# Altium PCB SIP00755AG.PCBDOC
Units mm, origin at the board's own origin, x right, y up, seen from the top; angles counter-clockwise.
Board outline 465 x 283.5 mm, 2 copper layers (Top Layer, Bottom Layer); 37 components, 59 nets, 178 pads, 25 vias.
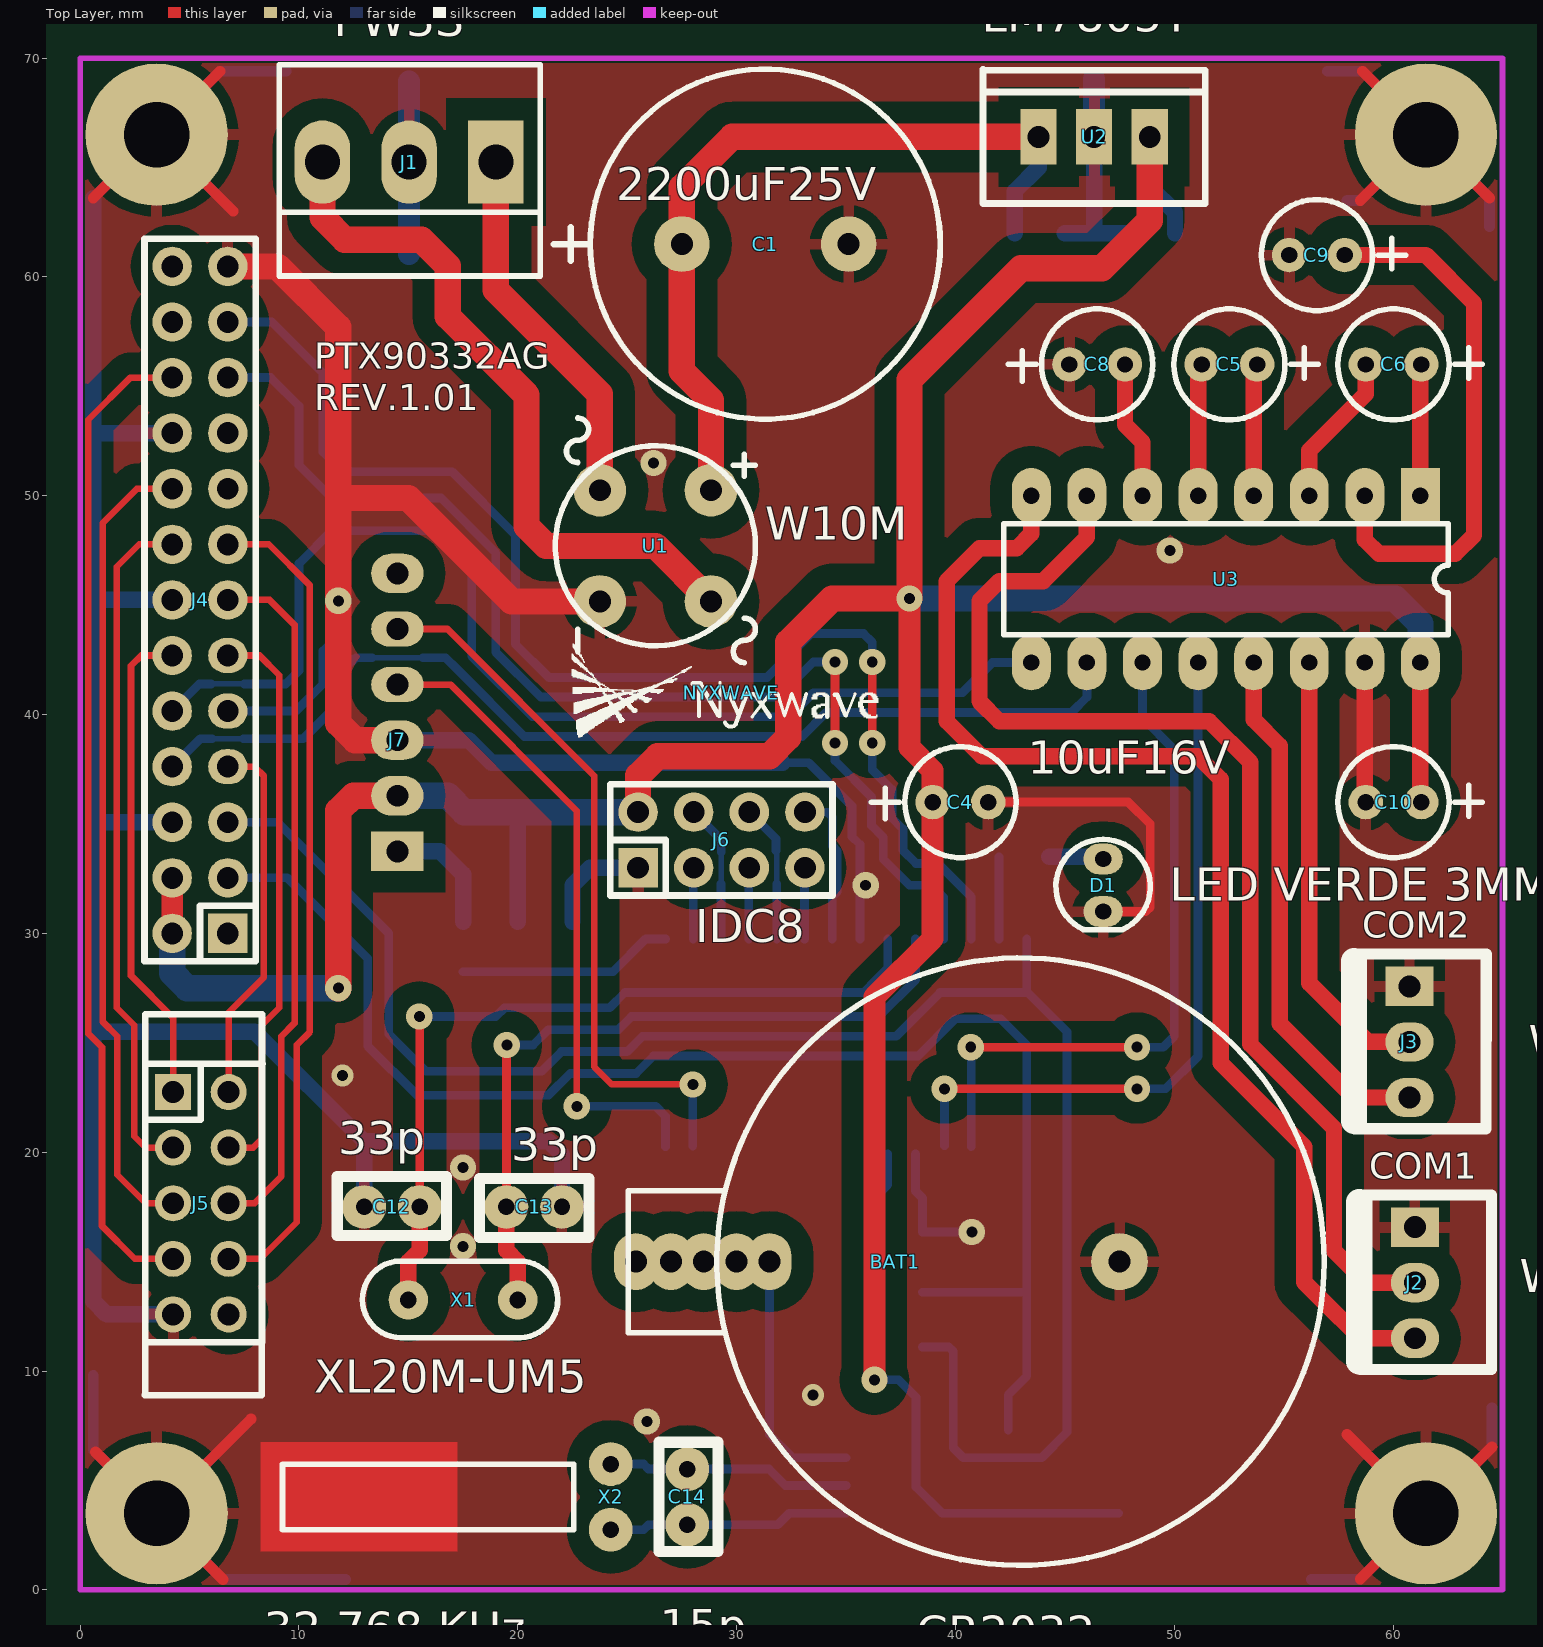
[diagram p0: Top Layer view]
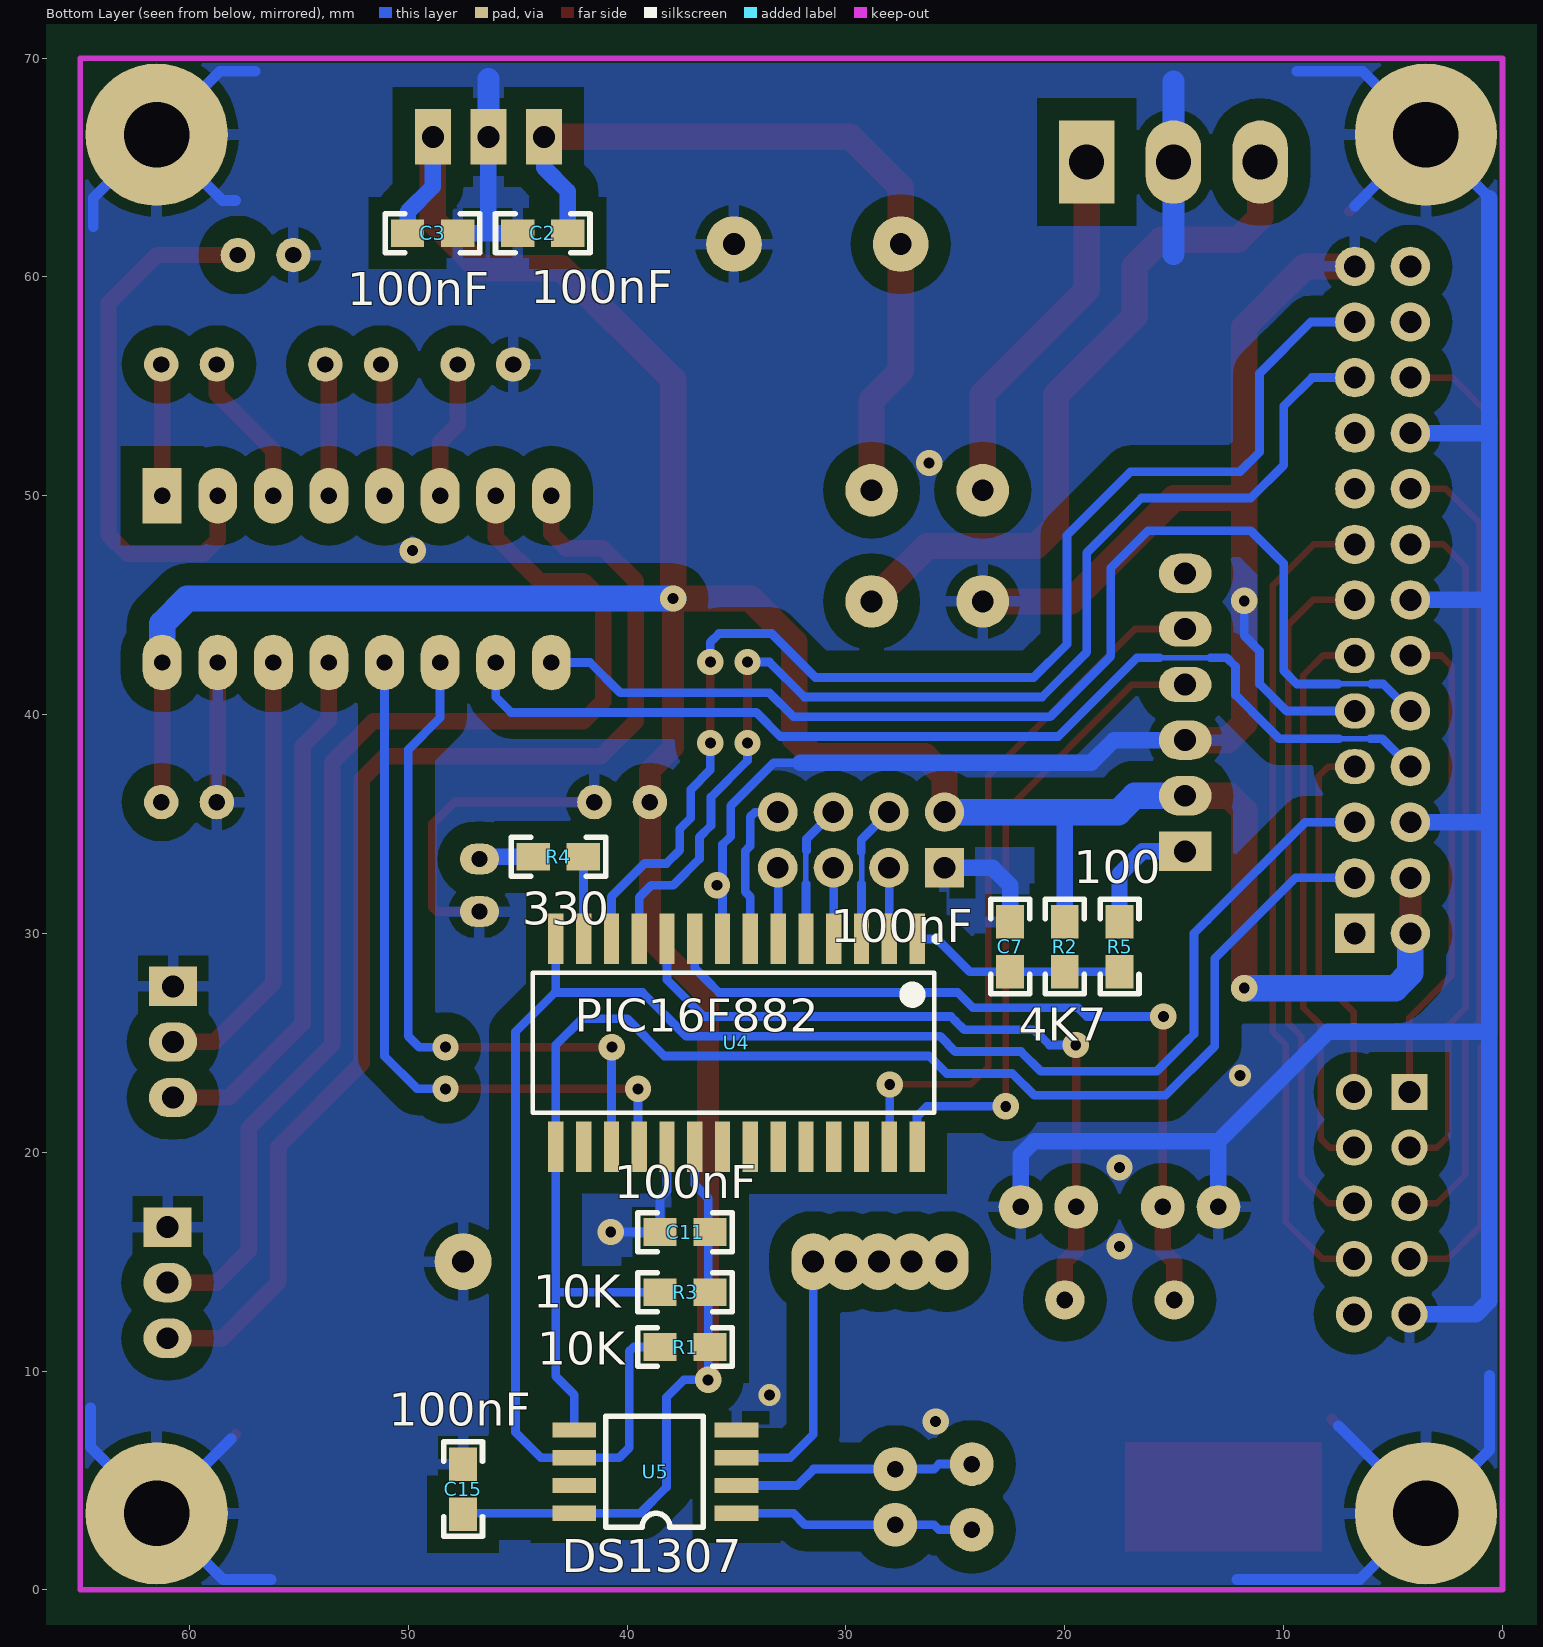
[diagram p1: Bottom Layer view, seen from below]

## Layer stack, top to bottom
Top Layer: signal copper 0.0356
Dielectric: dielectric 0.32, FR-4, Dk 4.8
Bottom Layer: signal copper 0.0356

## Board outline
-137.2,-168.2 -137.2,115 327.8,115 327.8,-168.5 -137.1,-168.5

## Design rules (kind name [scope] priority, off if disabled: settings)
Clearance GND [InNet('GND') vs InNet('GND')] p1: gap=0.5
Clearance KEEP [All vs OnLayer('Keep-Out Layer')] p2: gap=0.1
Clearance [All] p3: gap=1
ComponentClearance [All] p1: gap=0.254 collisioncheckmode=3 verticalgap=0.254
PolygonConnect [All] p1: connectstyle=Relief reliefconductorwidth=0.5 reliefentries=4 polygonreliefangle="90 Angle"
RoutingVias [All] p1: holewidth=0.711 width=1.27 viastyle="Through Hole" minholewidth=0.711 minwidth=1.27 maxholewidth=0.711 maxwidth=1.27
SolderMaskExpansion [All] p1: expansion=0.102
TestPointUsage [All] p1: valid=0 allowmultiple=FALSE
Testpoint [All] p1: side=15 testpointundercomponent=TRUE minsize=1.016 maxsize=2.54 preferedsize=1.524 minholesize=0 maxholesize=1.016 preferedholesize=0.813 testpointgrid=0.025 style=1023 order=0-112345678
Width [All] p1: maxlimit=3 minlimit=0.2 preferedwidth=0.3 bottomlayer_prefwidth=0.75 minimp=50.000000 maximp=50.000000 favimp=50.000000
17 further rules are at their usual default settings.

## Components (designator, comment, footprint, x,y, rotation, side; value= is the part's Value field where it differs from the comment)
BAT1 "CR2032" "CR2032 HOLDER" 27,15 r0 top locked
C1 "2200uF25V" "CE 7.5/16.0" 27.5,61.5 r0 top locked
C2 "100nF" 0805 45,62 r180 bottom locked
C3 "100nF" 0805 47.75,62 r0 bottom locked
C4 "10uF16V" "CE 2.5/5.0" 41.5,36 r180 top locked
C5 "10uF50V" "CE 2.5/5.0" 51.25,56 r0 top locked
C6 "10uF50V" "CE 2.5/5.0" 58.75,56 r0 top locked
C7 "100nF" 0805 22.5,28.25 r90 bottom locked
C8 "10uF50V" "CE 2.5/5.0" 47.75,56 r180 top locked
C9 "10uF50V" "CE 2.5/5.0" 55.25,61 r0 top locked
C10 "10uF50V" "CE 2.5/5.0" 58.75,36 r0 top locked
C11 "100nF" 0805 38.5,16.35 r180 bottom locked
C12 "33p" CAP2.54 14.25,17.5 r0 top locked
C13 "33p" CAP2.54 20.75,17.5 r180 top locked
C14 "15p" CAP2.54 27.75,4.25 r270 top locked
C15 "100nF" 0805 47.5,5.75 r270 bottom locked
D1 "LED VERDE 3MM" "LED 3MM" 46.75,31 r270 top locked
J1 "PW3S" PW3S 19,65.25 r180 top locked
J2 "WF3S" WF3S 61,11.5 r90 top locked
J3 "WF3S" WF3S 60.75,22.5 r90 top locked
J4 "HEADER26" IDC26 6.75,30 r90 top locked
J5 "IDC10" IDC10 4.25,22.75 r270 top locked
J6 "IDC8" IDC8 25.5,33 r0 top locked
J7 "ICSP" ICSP 14.5,33.75 r90 top locked
NYXWAVE "LOGO NYX" LOGO_NYX 29.75,41 r0 top locked
R1 "10K" 0805 38.5,11.1 r180 bottom locked
R2 "4K7" 0805 20,28.25 r90 bottom locked
R3 "10K" 0805 38.5,13.6 r180 bottom locked
R4 "330" 0805 42,33.5 r0 bottom locked
R5 "100" 0805 17.5,28.25 r90 bottom locked
U1 "W10M" CASE22 23.75,50.25 r90 top locked
U2 "LM7805T" TO-220_2 43.8,66.4 r0 top locked
U3 "MAX232 DIP-16" DIP16 61.25,50 r270 top locked
U4 "PIC16F882" "SOIC 28" 26.75,29.75 r270 bottom locked
U5 "DS1307" "soic 8" 35,3.5 r0 bottom locked
X1 "XL20M-UM5" UM5 15,13.25 r0 top locked
X2 "32.768 KHz" "XTAL ACOSTADO" 24.25,5.75 r270 top locked

## Footprints (in the part's own frame and the unit in brackets; to place one, negate y for a bottom-side part, rotate by r counter-clockwise, add the part's x,y. Pads: shape width x height; smd on the part's side, far side on the other; paste and mask are expansions set on the pad)
0805 [mil]
  rect 60x50 smd: 1(0,0) 2(90,0)
  silkscreen extent -40,-35 130,35
CAP2.54 [mm] "CAPACITOR AXIAL 2.54"
  round 2 hole 0.75: 1(-1.27,0) 2(1.27,0)
  silkscreen extent -2.5,-1.3 2.5,1.4
CASE22 [mm]
  round 2.4 hole 1: 1(0,-5.08) 2(0,0) 3(-5.08,0) 4(-5.08,-5.08)
  silkscreen extent -7.87,-7.11 3.3,2.03
"CE 2.5/5.0" [mil]
  round 62 hole 29.53: 1(100,0) 2(0,0)
  silkscreen extent -50,-100 210,100
"CE 7.5/16.0" [mm]
  round 2.54 hole 1: 1(0,0) 2(7.62,0)
  silkscreen extent -5.84,-8 11.81,8
"CR2032 HOLDER" [mm]
  oval 2x2.6 hole 1: +(0,0)
  round 2.6 hole 1: -(20.5,0)
  silkscreen extent -1.96,-13.88 29.86,13.88
DIP16 [mm]
  rect 2.54x1.778 hole 0.75: 1(0,0)
  oval 2.54x1.778 hole 0.75: 2(0,-2.54) 3(0,-5.08) 4(0,-7.62) 5(0,-10.16) 6(0,-12.7) 7(0,-15.24) 8(0,-17.78) 9(7.62,-17.78) 10(7.62,-15.24) 11(7.62,-12.7) 12(7.62,-10.16) 13(7.62,-7.62) 14(7.62,-5.08) 15(7.62,-2.54) 16(7.62,0)
  silkscreen extent 1.27,-19.05 6.35,1.27
ICSP [mm] "PROGRAMADOR PICKIT 2"
  round 1.3 on Top Overlay: 0(-2.515,0)
  rect 1.8x2.4 hole 1: 1(0,0)
  oval 1.8x2.4 hole 1: 2(2.54,0) 3(5.08,0) 6(12.7,0)
  oval 1.6x2.4 hole 1: 4(7.62,0) 5(10.16,0)
IDC8 [mm]
  rect 1.8x1.8 hole 1: 1(0,0)
  round 1.8 hole 1: 2(0,2.54) 3(2.54,0) 4(2.54,2.54) 5(5.08,0) 6(5.08,2.54) 7(7.62,0) 8(7.62,2.54)
  silkscreen extent -1.27,-1.27 8.88,3.81
IDC10 [mil]
  rect 65x65 hole 39.37: 1(0,0)
  round 65 hole 39.37: 2(0,100) 3(100,0) 4(100,100) 5(200,0) 6(200,100) 7(300,0) 8(300,100) 9(400,0) 10(400,100)
  silkscreen extent -140,-51 545,161
IDC26 [mm]
  rect 1.8x1.8 hole 1: 1(0,0)
  round 1.8 hole 1: 2(0,2.54) 3(2.54,0) 4(2.54,2.54) 5(5.08,0) 6(5.08,2.54) 8(7.62,2.54) 10(10.16,2.54) 12(12.7,2.54) 13(15.24,0) 14(15.24,2.54) 15(17.78,0) 16(17.78,2.54) 17(20.32,0) 18(20.32,2.54) 19(22.86,0) 20(22.86,2.54) 21(25.4,0) 22(25.4,2.54) 23(27.94,0) 24(27.94,2.54) 25(30.48,0) 26(30.48,2.54)
  oval 1.6x1.8 hole 1: 7(7.62,0) 9(10.16,0) 11(12.7,0)
  silkscreen extent -1.27,-1.27 31.75,3.81
"LED 3MM" [mm]
  oval 1.4x1.8 hole 0.75: A(-2.4,0) K(0,0)
  silkscreen extent -3.3,-2.16 0.82,2.16
LOGO_NYX [mm] "LOGO DE NYXWAVE"
  silkscreen extent -7.29,-2.01 6.73,2.24
PW3S [mm]
  rect 2.54x3.81 hole 1.6: 1(0,0)
  oval 2.54x3.81 hole 1.6: 2(3.962,0) 3(7.925,0)
  silkscreen extent -2.03,-4.44 9.91,5.21
"soic 8" [mm]
  rect 2x0.7 smd: 1(0,0) 2(0,-1.27) 3(0,-2.54) 4(0,-3.81) 5(7.417,-3.81) 6(7.417,-2.54) 7(7.417,-1.27) 8(7.417,0)
  silkscreen extent 1.52,-4.44 5.97,0.64
"SOIC 28" [mm]
  rect 2.3x0.7 smd: 1(0,0) 2(0,-1.27) 3(0,-2.54) 4(0,-3.81) 5(0,-5.08) 6(0,-6.35) 7(0,-7.62) 8(0,-8.89) 9(0,-10.16) 10(0,-11.43) 11(0,-12.7) 12(0,-13.97) 13(0,-15.24) 14(0,-16.51) 15(9.5,-16.51) 16(9.5,-15.24) 17(9.5,-13.97) 18(9.5,-12.7) 19(9.5,-11.43) 20(9.5,-10.16) 21(9.5,-8.89) 22(9.5,-7.62) 23(9.5,-6.35) 24(9.5,-5.08) 25(9.5,-3.81) 26(9.5,-2.54) 27(9.5,-1.27) 28(9.5,0)
  silkscreen extent -0.12,-17.56 7.95,1.02
TO-220_2 [mm]
  rect 1.651x2.54 hole 1: 1(0,0) 2(2.54,0) 3(5.08,0)
  silkscreen extent -2.54,-3.05 7.62,3.09
UM5 [mm] "UM-5"
  round 1.8 hole 0.762: 1(0,0) 2(5,0)
  silkscreen extent -2.1,-1.72 6.83,1.78
WF3S [mm]
  rect 1.8x2.2 hole 1: 1(5.08,0)
  oval 1.8x2.2 hole 1: 2(2.54,0) 3(0,0)
  silkscreen extent -1.42,-3.51 6.55,2.54
"XTAL ACOSTADO" [mm]
  round 2 hole 0.75: 1(0,0) 2(3,0)
  Top Layer region: -1,-16 4,-16 4,-7 -1,-7
  silkscreen extent 0,-15 3,-1.7

## Part data
BAT1: library part "CR2032 BATTERY 3V", "CR2032 BATTERY 3V"
C1: "CAPACITOR ELECTROLITICO RADIAL 16X25 mm PASO 7.5 mm +/-20% 85ºC 25V 2200uF"
C2 C3 C7 C11 C15: library part 100n, "CAPACITOR SMD 0805 X7R  50 V 100 nF"
C4: "CAPACITOR ELECTROLITICO RADIAL 5X11mm PASO 2mm 85ªC +/-20 16V 10uF"
C5 C6 C8 C9 C10: "CAPACITOR ELECTROLITICO RADIAL 5 X11mm PASO 2 mm 85ºC +/-20% 50 V 10 uF"
C12 C13: "CAPACITOR PLATE NP0 100V PASO 2.54 mm 33 pF"
C14: "CAPACITOR CERAMICO DISCO 2.54 mm  X7R  50V  15pF"
J1: "PW3S HEADER .156\" RECTO 3 VIAS"
J2 J3: "WF3S HEADER .100\" RECTO 3 VIAS"
J4: "CONECTOR IDC MACHO PCB NO POLARIZADO PASO 2.54 mm RECTO 2X13 VIAS"
J5: "CONECTOR IDC HEMBRA PCB NO POLARIZADO PASO 2.54 mm RECTO 2X5 VIAS"
J6: "CONECTOR IDC HEMBRA PCB NO POLARIZADO PASO 2.54 mm RECTO 2X4 VIAS"
J7: "TIRA MOLEX 1X6 11MM MACHO RECTA PARA PCB"
NYXWAVE: library part "LOGO NYXWAVE", "LOGO DE NYXWAVE"
R1 R3: "RESISTOR SMD0805 0.125 W 5%  10 K OHMS"
R2: "RESISTOR SMD0805 0.125 W 5%  4.7 K OHMS"
R4: "RESISTOR METAL FILM 0.5 W 5% 330 OHMS"
R5: "RESISTOR SMD0805 0.125 W 5%  100 OHMS"
U1: "W10M CASE22 CIRC INT RECTIFICADOR PUENTE 1000V 1A"
U2: "LM7805T TO-220 CIRC INT"
U3: "MAX232 DIP-16 CIRCUITO INTEGRADO"
U4: library part "PIC16F882 SOIC28", "PIC16F872 -I/SO SOIC 28 PINES"
U5: "64 X 8 SERIAL REAL TIME CLOCK"
X1: "XL20M-UM5 CRISTAL DE 20 MHZ 10ppm"
X2: "32.768 KHz CRISTAL"

## Free pads (board coordinates)
  round 6.5 hole 3: 0(3.5,3.5) 0(3.5,66.5) 0(61.5,3.5) 0(61.5,66.5)
  oval 2x2.6 hole 1: 0(25.4,15) 0(28.5,15) 0(30,15) 0(31.5,15)
  round 1.4 on Top Overlay: 1(1.6,22.8) 1(9.5,30) 1(25.5,30.6)

## Via types
v1: diameter 1.2, hole 0.5, Top Layer to Bottom Layer, 23 vias
v2: diameter 1, hole 0.5, Top Layer to Bottom Layer, 2 vias

## Nets (pads, with @x,y where several pads share a name; then routed paths per layer and width w, separated by ;. In a path a pad name is that pad's centre, name@x,y a point inside that pad or via, vN(x,y) a via of type N, cw(c..) or ccw(c..) an arc to the next point about the centre after c; other vN are vias at no path point)
+3.3V: J4.17
+3V3: J4.1
+5V: C3.2 C4.1 C10.1 C11.2 C15.2 J4.2 J4.4 J6.2 J7.2 R1.2 R2.2 R3.2 U2.3 U3.16 U4.20 U5.8 | length 188.4
  Top Layer w0.75: C10.1@61.25,36.04 U3.16
  Top Layer w1: J4.2 J4.4 ; v1(36.3,9.6) 36.3,27.1 38.96,29.76 38.96,37.44 37.9,38.5 v1(37.9,45.3)
  Top Layer w1.2: v1(11.8,27.5) 11.8,35.6 12.49,36.29 J7.2 ; J6.2 25.5,37.2 26.4,38.1 31.5,38.1 32.366,38.966 32.366,43.3 34.366,45.3 v1(37.9,45.3) 37.9,55.3 43,60.4 46.7,60.4 48.88,62.58 U2.3
  Bottom Layer w0.4: v1@36.3,9.7 36.405,9.7 36.35,9.648 v1(36.3,9.6) ; U4.20@36.91,19.933 36.91,18.51 36.3,17.9 v1(36.3,9.6) ; C15.2@47.464,3.5 39.4,3.5 38.2,4.7 38.2,8.8 37.4,9.6 v1(36.3,9.6)
  Bottom Layer w0.75: R2.2 20,35.54 ; U2.3 48.88,64.12 50.036,62.964 C3.2
  Bottom Layer w1.2: J4.2 4.21,28.19 4.9,27.5 v1(11.8,27.5) ; J7.2 16.81,36.29 17.56,35.54 J6.2 ; v1(37.9,45.3) 60.1,45.3 61.25,44.15 U3.16
CONTROL: J4.13 J5.6 | length 31.9
  Top Layer w0.3: J4.13 8.66,45.24 9.8,44.1 9.8,25.9 9.2,25.3 9.2,18.9 7.97,17.67 J5.6
"DIR 1": J4.7 J5.2 | length 16.9
  Top Layer w0.3: J4.7 7.98,37.62 8.4,37.2 8.4,28 6.79,26.39 J5.2
"DIR 2": J4.16 J5.3 | length 31.3
  Top Layer w0.3: J4.16 2.7,47.78 1.677,46.757 1.677,26.6 2.477,25.8 2.477,20.733 3,20.21 J5.3
"DIR 3": J4.11 J5.4 | length 25.9
  Top Layer w0.3: J4.11 8.2,42.7 9.1,41.8 9.1,26.6 8.3,25.8 8.3,20.61 7.9,20.21 J5.4
"DIR 4": J4.18 J5.5 | length 37
  Top Layer w0.3: J4.18 2.6,50.32 1.027,48.747 1.027,25.973 1.7,25.3 1.7,18.97 3,17.67 J5.5
ENTRADA: J4.15 J5.8 | length 37.7
  Top Layer w0.3: J4.15 8.62,47.78 10.5,45.9 10.5,25.5 9.9,24.9 9.9,16.8 8.23,15.13 J5.8
GND: BAT1.- C1.2 C2.1 C3.1 C4.2 C7.2 C8.1 C9.2 C10.2 C11.1 C12.1 C13.1 C15.1 D1.K J1.2 J2.1 J3.1 J4.6 J4.9 J4.14 J4.20 J4.25 J5.9 J6.1 J7.3 pad.0@3.5,3.5 pad.0@3.5,66.5 pad.0@61.5,3.5 pad.0@61.5,66.5 U1.3 U2.2 U3.15 U4.8 U4.19 U5.4 | length 347
  Top Layer w0.4: C4.2 47.9,36 48.9,35 48.9,31.2 48.7,31 D1.K
  Top Layer w0.5: 0.6,63.6 6.398,69.398 ; 0.7,6.3 6.523,0.477 ; pad.0@3.5,3.5 7.8,7.8 ; pad.0@3.5,66.5 7,63 ; 57.9,7.1 pad.0@61.5,3.5 ; 58.5,0.5 64.523,6.523 ; 58.5,63.5 pad.0@61.5,66.5 ; 58.6,69.4 64.4,63.6
  Top Layer w0.75: C10.2@58.71,36.11 U3.15
  Top Layer w1.2: J4.25 9.02,60.48 11.8,57.7 11.8,39.6 12.57,38.83 J7.3 ; 11.8,49.9 15,49.9 19.73,45.17 U1.3
  Bottom Layer w0.4: J4.9 9.86,40.16 11.1,41.4 11.1,42.9 11.8,43.6 v1(11.8,45.2) ; 32.1,37.8 33.3,37.8 35.27,35.83 35.27,34.43 35.64,34.06 U4.8 ; U4.19@38.18,19.933 38.18,18.22 38.5,17.9 C11.1 v1(40.75,16.35)
  Bottom Layer w0.5: 0.6,9.8 0.6,6.4 6.523,0.477 12.123,0.477 ; 0.602,63.602 pad.0@3.5,66.5 ; pad.0@3.5,3.5 7.5,7.5 ; 6.75,63.25 pad.0@3.5,66.5 ; 9.4,69.4 6.4,69.4 pad.0@3.5,66.5 ; 56.277,0.477 58.477,0.477 64.523,6.523 64.523,8.323 ; 57,69.4 58.6,69.4 64.4,63.6 64.4,62.3 ; 57.9,63.5 58.5,63.5 pad.0@61.5,66.5 ; 58.1,6.9 pad.0@61.5,3.5
  Bottom Layer w0.75: 0.602,25.5 7.98,25.5 12.98,20.5 ; 0.602,35.08 J4.6 ; 0.602,63.602 0.602,13.198 1.21,12.59 J5.9 ; 0.642,52.86 J4.20 ; 0.662,45.24 J4.14 ; C12.1 12.98,20.5 ; J7.3 17.77,38.83 18.8,37.8 32.1,37.8 ; C13.1 22.02,19.88 21.4,20.5 12.98,20.5 ; C7.2 22.5,32.2 23.3,33 J6.1 ; C2.1 C3.1 ; 46.34,62 U2.2
  Bottom Layer w1: 15.038,61.038 J1.2 15.038,68.938 ; U2.2 46.34,69.04
  other v1: 25.9,7.7 17.5,15.7 17.5,19.3 35.9,32.2 49.8,47.5 26.2,51.5
  other v2: 33.5,8.9 12,23.5
I2C_SCL: J4.5 R1.1 U4.14 U5.6 | length 80.5
  Bottom Layer w0.4: J4.5 9.02,35.08 13.483,30.617 14.1,30 14.1,25.4 14.467,25.033 15.8,23.7 21.1,23.7 22,24.6 25,24.6 25.7,25.3 37.3,25.3 39.3,27.3 43.3,27.3 45.1,25.5 45.1,7.2 43.94,6.04 40.36,6.04 39.9,6.5 39.9,10.9 39.7,11.1 R1.1 ; 43.26,27.34 U4.14
I2C_SDA: J4.3 R3.1 U4.15 U5.5 | length 67.6
  Bottom Layer w0.4: J4.3 9.46,32.54 13.15,28.85 13.15,24.85 15.4,22.6 21.4,22.6 22.4,23.6 25.4,23.6 26.2,24.4 38.3,24.4 40,26.1 42.06,26.1 43.26,24.9 43.26,9.76 42.417,8.917 U5.5 ; R3.1 43.26,13.6
LED: R4.1 U4.13 | length 3.7
  Bottom Layer w0.4: U4.13 R4.1@41.99,33.49
MCLR: C7.1 R2.1 R5.1 U4.1 | length 9.9
  Bottom Layer w0.4: R5.1 24.35,28.25 25.85,29.75 U4.1
NetBAT1_+: BAT1.+ pad.0@25.4,15 pad.0@28.5,15 pad.0@30,15 pad.0@31.5,15 U5.3 | length 11.8
  Bottom Layer w0.4: pad.0@31.5,15 31.5,7.1 32.56,6.04 U5.3
NetC5_1: C5.1 U3.4 | length 5.9
  Top Layer w0.75: U3.4 C5.1@53.63,55.93
NetC5_2: C5.2 U3.5 | length 5.8
  Top Layer w0.75: U3.5 C5.2@51.09,55.84
NetC6_1: C6.1 U3.1 | length 6.1
  Top Layer w0.75: U3.1@61.1,49.9 U3.1@61.1,50 ; U3.1 C6.1@61.25,55.95
NetC6_2: C6.2 U3.3 | length 7.1
  Top Layer w0.75: U3.3 56.17,52.07 58.75,54.65 C6.2
NetC8_2: C8.2 U3.6 | length 6.3
  Top Layer w0.75: C8.2 47.75,53.25 48.55,52.45 U3.6
NetC9_1: C9.1 U3.2 | length 25
  Top Layer w0.75: C9.1 61.5,61 63.7,58.8 63.7,48.2 62.844,47.344 59.356,47.344 58.71,47.99 U3.2
NetC12_2: C12.2 U4.9 X1.1 | length 36.8
  Top Layer w0.4: C12.2 v1@15.52,26.18
  Top Layer w0.75: X1.1 15,15 15.52,15.52 C12.2
  Bottom Layer w0.4: v1(15.5,26.2) 19,26.2 19.4,26.6 24.2,26.6 24.9,27.3 35.8,27.3 36.389,27.889 36.91,28.41 U4.9
NetC13_2: C13.2 U4.10 X1.2 | length 33.9
  Top Layer w0.4: C13.2 v1@19.48,25.18
  Top Layer w0.75: C13.2 19.48,15.52 20,15 X1.2
  Bottom Layer w0.4: v1(19.5,24.9) 20.7,24.9 21.4,25.6 24.6,25.6 25,26 25.2,26.2 36.5,26.2 38.18,27.88 U4.10
NetC14_1: C14.1 U5.2 X2.1 | length 11.2
  Bottom Layer w0.4: X2.1 25.75,5.75 25.98,5.52 31.48,5.52 32.23,4.77 U5.2
NetC14_2: C14.2 U5.1 X2.2 | length 11.1
  Bottom Layer w0.4: X2.2 25.75,2.75 25.98,2.98 31.88,2.98 32.4,3.5 U5.1
NetD1_A: D1.A R4.2 | length 2.4
  Bottom Layer w0.75: R4.2 D1.A@46.65,33.5
NetJ1_1: J1.1 U1.2 | length 17
  Top Layer w1.2: J1.1 19,59.4 23.75,54.65 U1.2
NetJ1_3: J1.3 U1.4 | length 32.4
  Top Layer w1.2: J1.3 11.075,62.725 12.1,61.7 15.6,61.7 16.8,60.5 16.8,58.2 20.4,54.6 20.4,48.6 21.3,47.7 26.3,47.7 U1.4
NetJ7_1: J7.1 R5.2 | length 5.6
  Bottom Layer w0.75: J7.1 16.45,33.75 17.5,32.7 R5.2
PGC: J7.5 U4.27 | length 32.7
  Top Layer w0.3: J7.5 16.79,43.91 23.5,37.2 23.5,23.9 24.3,23.1 v1(28,23.1)
  Bottom Layer w0.4: U4.27@28,20.27 v1(28,23.1)
PGD: J7.4 U4.28 | length 29.7
  Top Layer w0.3: J7.4 16.93,41.37 22.7,35.6 v1(22.7,22.1)
  Bottom Layer w0.4: v1(22.7,22.1) 26.3,22.1 26.75,21.65 U4.28
RA0: J6.3 U4.2 | length 3.2
  Bottom Layer w0.4: U4.2 J6.3@28.02,32.98
RA1: J6.4 U4.3 | length 6.5
  Bottom Layer w0.25: 29.29,32.265 29.29,33.865
  Bottom Layer w0.4: J6.4 29.3,34.28 29.3,33.718 ; U4.3 29.29,32.265
RA2: J6.5 U4.4 | length 3.2
  Bottom Layer w0.4: U4.4 J6.5@30.56,32.98
RA3: J6.6 U4.5 | length 6.4
  Bottom Layer w0.25: 31.83,32.265 31.83,33.865
  Bottom Layer w0.4: J6.6 31.8,34.32 31.8,33.784 ; U4.5 31.83,32.265
RA4: J6.7 U4.6 | length 3.2
  Bottom Layer w0.4: U4.6 J6.7@33.1,32.98
RA5: J6.8 U4.7 | length 7.1
  Bottom Layer w0.4: J6.8 34.16,35.54 34.37,35.33 34.37,33.999 34.6,33.769 34.6,31.9 34.37,31.67 U4.7
RB0: U4.21
RB1: U4.22
RB2: U4.23
RB3: U4.24
RB4: U4.25
RB5: U4.26
RX1: J2.3 U3.8 | length 57.2
  Top Layer w0.75: U3.8 43.47,48.27 42.8,47.6 41.1,47.6 39.6,46.1 39.6,39.7 41.2,38.1 51.07,38.1 52.12,37.05 52.12,24.08 55.95,20.25 55.95,14.05 56.751,13.249 58.5,11.5 J2.3
RX1D: J4.10 U3.9 | length 52.6
  Bottom Layer w0.25: 5.9,41.4 7.6,41.4
  Bottom Layer w0.4: J4.10 5.45,41.4 5.998,41.4 ; 7.502,41.4 9.4,41.4 10,42 10,46.9 11.5,48.4 16.2,48.4 17.9,46.7 17.9,42.673 20.673,39.9 32.4,39.9 33.5,41 40.32,41 41.7,42.38 U3.9
RX2: J3.3 U3.13 | length 24.3
  Top Layer w0.75: U3.13 53.63,39.77 54.82,38.58 54.82,25.88 58.2,22.5 J3.3
RX2D: U3.12 U4.18 | length 32.8
  Top Layer w0.4: v1(39.5,22.9) v1(48.3,22.9)
  Bottom Layer w0.4: U4.18@39.5,20.3 v1(39.5,22.9) ; v1(48.3,22.9) 49.6,22.9 51.09,24.39 U3.12
SALIDA: J4.22 J5.7 | length 45.6
  Top Layer w0.3: J4.22 2.3,55.4 0.377,53.477 0.377,25.423 1,24.8 1,16.63 2.5,15.13 J5.7
SPI_CE0: J4.24
SPI_CE1: J4.26
SPI_MISO: J4.21 U4.11 | length 54
  Top Layer w0.4: v1(34.5,38.7) v1(34.5,42.4)
  Bottom Layer w0.4: J4.21 8.7,55.4 10,54.1 10,51.4 11.5,49.9 16.5,49.9 19,47.4 19,42.846 21.046,40.8 31.9,40.8 33.5,42.4 v1(34.5,42.4) ; v1(34.5,38.7) 34.5,37.9 36.17,36.23 36.17,34.93 36.7,34.4 36.7,33.4 37.9,32.2 38.9,32.2 39.45,31.65 U4.11
SPI_MOSI: J4.19
SPI_SCLK: J4.23 U4.12 | length 58.2
  Top Layer w0.4: v1(36.2,38.7) v1(36.2,42.4)
  Bottom Layer w0.4: J4.23 8.76,57.94 11.1,55.6 11.1,52 12,51.1 17,51.1 19.9,48.2 19.9,43.218 21.418,41.7 31.4,41.7 33.4,43.7 35.8,43.7 36.2,43.3 v1(36.2,42.4) ; v1(36.2,38.7) 36.2,37.473 37.1,36.573 37.1,35.273 37.6,34.773 37.6,33.8 38.2,33.2 39.2,33.2 40.72,31.68 U4.12
STROBE: J4.12 J5.1 | length 22.4
  Top Layer w0.3: J4.12 2.8,42.7 2.327,42.227 2.327,28.073 4.25,26.15 J5.1
TX1: J2.2 U3.7 | length 54.3
  Top Layer w0.75: U3.7 46.01,48.1 44.01,46.1 42,46.1 41.1,45.2 41.1,40.6 42,39.7 51.6,39.7 53.47,37.83 53.47,24.93 57.3,21.1 57.3,15.5 58.76,14.04 J2.2
TX1D: J4.8 U3.10 | length 48.7
  Bottom Layer w0.25: 5.9,38.9 7.6,38.9 ; 13.341,42.6 15.641,42.6
  Bottom Layer w0.4: J4.8 5.49,38.9 6.032,38.9 ; 7.468,38.9 10.2,38.9 10.773,39.473 12.2,40.9 12.2,42.2 12.6,42.6 13.341,42.6 ; 15.659,42.6 16.7,42.6 17.206,42.094 20.3,39 33,39 34.1,40.1 45.31,40.1 46.01,40.8 U3.10
TX2: J3.2 U3.14 | length 20.3
  Top Layer w0.75: U3.14 56.17,27.73 58.86,25.04 J3.2
TX2D: U3.11 U4.17 | length 31.7
  Top Layer w0.4: v1(40.7,24.8) v1(48.3,24.8)
  Bottom Layer w0.4: U4.17 v1@40.72,24.78 ; v1(48.3,24.8) 49.5,24.8 50,25.3 50,38.4 48.55,39.85 U3.11
VCC: C1.1 C2.2 U1.1 U2.1 | length 36.5
  Top Layer w1.2: U1.1 28.83,54.37 27.5,55.7 27.5,64.1 29.8,66.4 U2.1
  Bottom Layer w0.75: C2.2 42.714,63.914 43.8,65 U2.1
pads on no net: J5.10 J7.0 J7.6 U4.16 U5.7

## Polygon pours and split planes (outlines as drawn)
GND on Top Layer (solid, remove dead copper): 0,0 0,70 65,70 65,0
GND on Bottom Layer (solid, remove dead copper): 0,0 0,70 65,70 65,0

## Keep-outs
Keep-Out Layer:
  lines w0.254: 0,0 0,70 65,70 65,0 0,0

## Silkscreen, mask and mechanical layers (free items; w line width, h text height)
Top Overlay:
  text "PTX90332AG" at 10.7,55.8 h1.2
  text "REV.1.01" at 10.7,53.9 h1.2
  text "COM2" at 58.6,29.8 h1.2
  text "COM1" at 58.9,18.8 h1.2